# EAGLE board Wordclock-main (EAGLE 6.3)
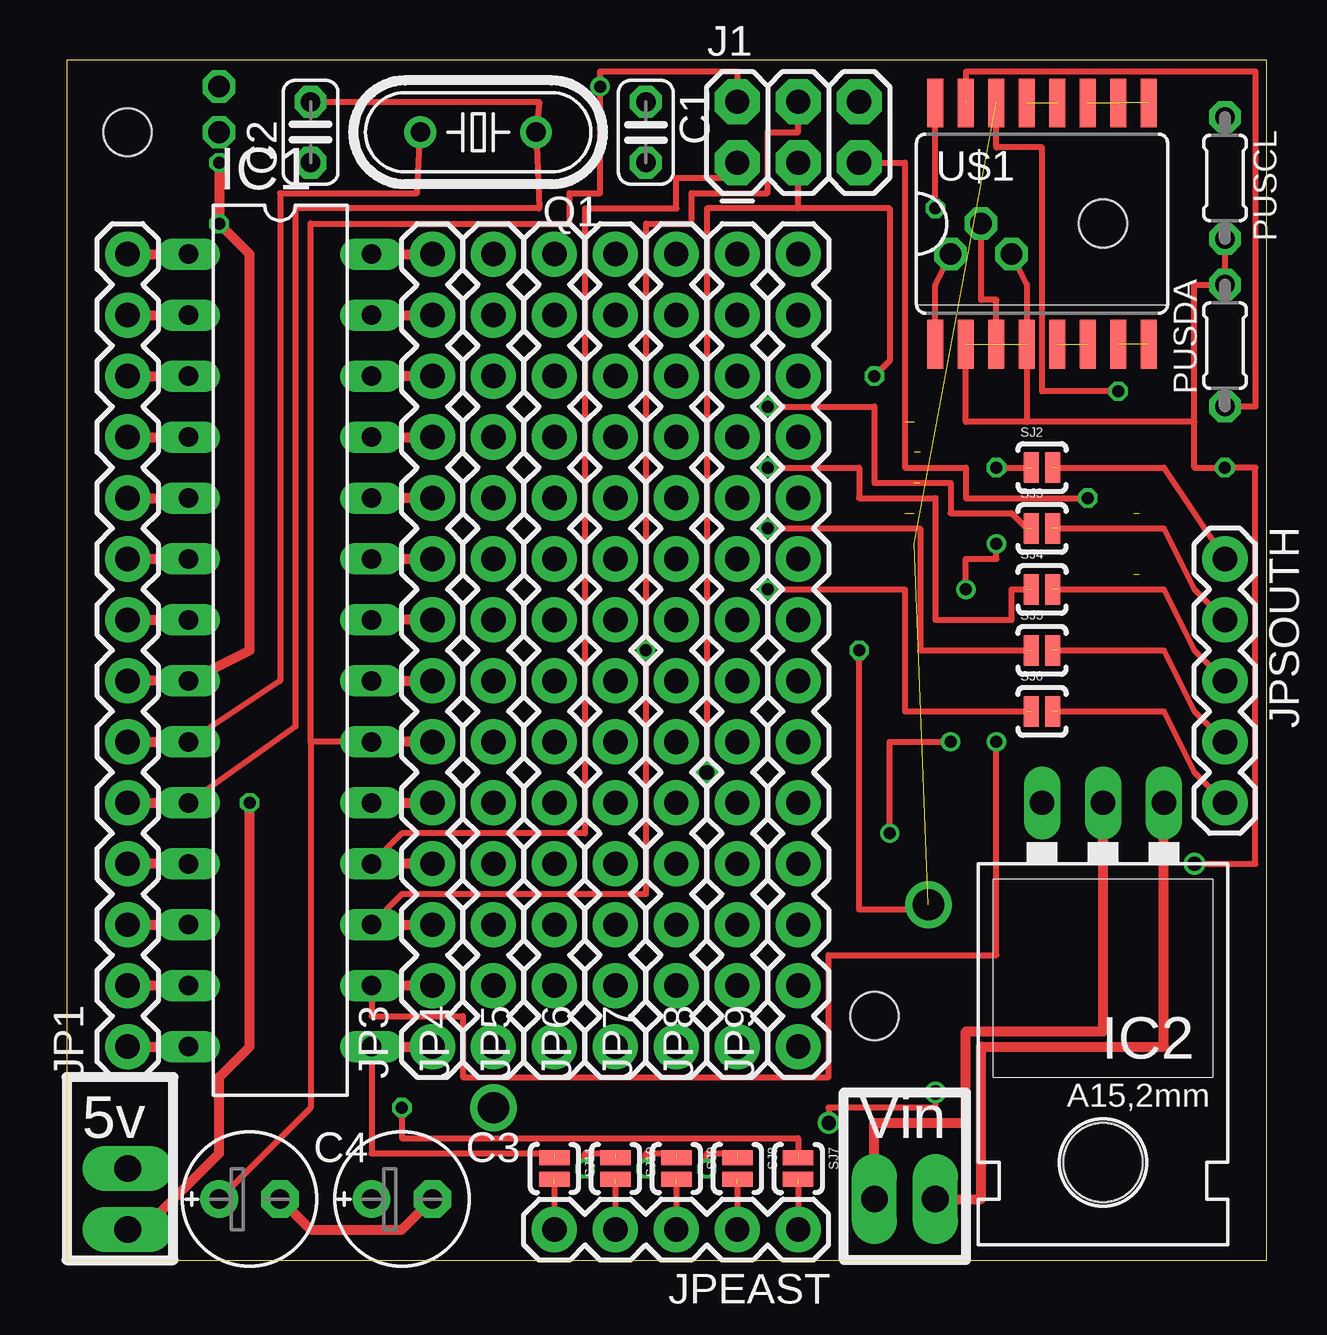
[diagram p0: board, top side]
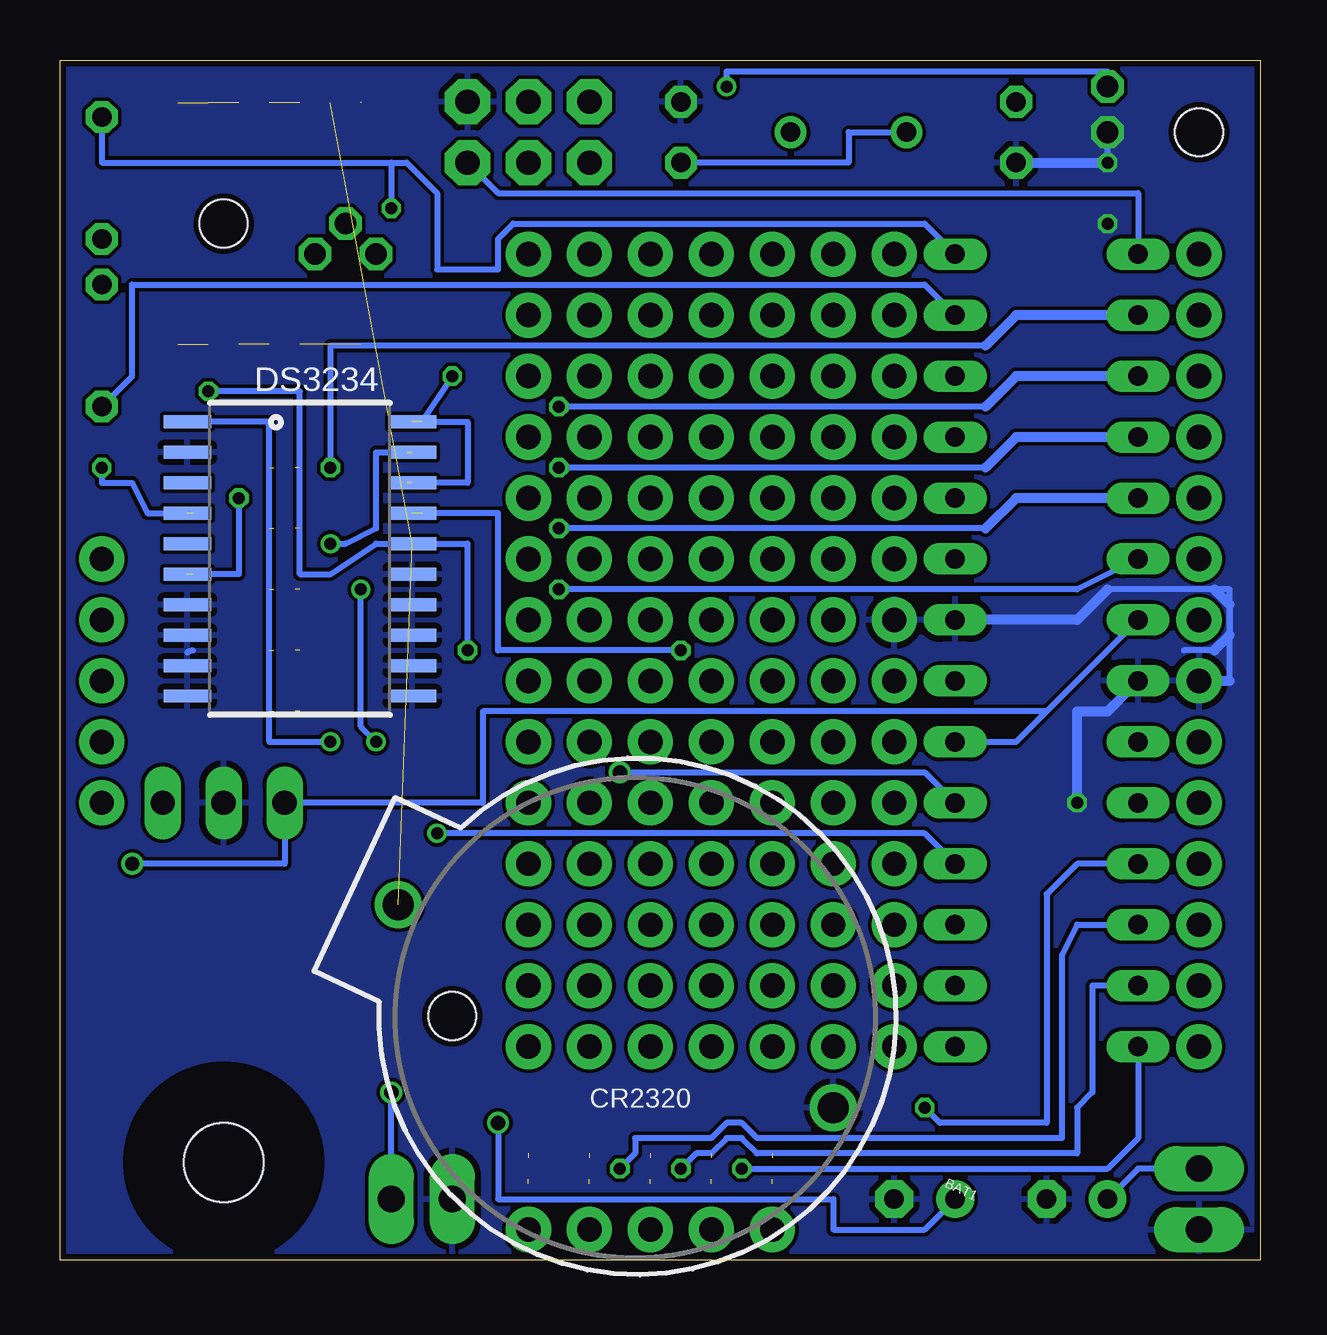
[diagram p1: board, bottom side, seen from below]

Size 50 x 50 mm. Coordinates in mm from the lower left corner, seen from the top.
Outline: 0,0 50,0 50,50 0,50 0,0
Copper layers (1*16): Top 0.035mm / dielectric 1.5mm / Bottom 0.035mm
Design rules "default": minimum track width 6mil, minimum drill 12mil, track to track 6mil, track to pad 6mil, pad to pad 6mil, via to via 6mil, smd to smd 0mil, copper to edge 10mil, drill to drill 10mil, minimum pad ring 10mil, minimum via ring 6mil, stop-mask expansion 2mil, vias tented up to drill 100mil, thermal gap 10mil
Holes 2 mm at 33.66,10.16 2.54,46.99 43.18,43.18

## Footprints (pad centres in the part's own frame; a part is rotated, then mirrored left to right if it is on the bottom)
1X02_LONGPADS = drill 1.118 pad 1.88 long: 1 0,0; 2 2.54,0
BATTCOM_20MM_PTH = drill 1.3: 1 20,0; 2 0,0
C025-024X044 = drill 0.813 octagon: 1 -1.27,0; 2 1.27,0
E2,5-6E = drill 0.813 pad 1.575: + -1.27,0 | drill 0.813 pad 1.575 octagon: - 1.27,0
DS3234 = smd 0.53 x 1.98: 1 -5.715,-4.685; 2 -4.445,-4.685; 3 -3.175,-4.685; 4 -1.905,-4.685; 5 -0.635,-4.685; 6 0.635,-4.685; 7 1.905,-4.685; 8 3.175,-4.685; 9 4.445,-4.685; 10 5.715,-4.685; 11 5.715,4.685; 12 4.445,4.685; 13 3.175,4.685; 14 1.905,4.685; 15 0.635,4.685; 16 -0.635,4.685; 17 -1.905,4.685; 18 -3.175,4.685; 19 -4.445,4.685; 20 -5.715,4.685
DIL28-3 = drill 0.813 long: 1 -16.51,-3.81; 2 -13.97,-3.81; 3 -11.43,-3.81; 4 -8.89,-3.81; 5 -6.35,-3.81; 6 -3.81,-3.81; 7 -1.27,-3.81; 8 1.27,-3.81; 9 3.81,-3.81; 10 6.35,-3.81; 11 8.89,-3.81; 12 11.43,-3.81; 13 13.97,-3.81; 14 16.51,-3.81; 15 16.51,3.81; 16 13.97,3.81; 17 11.43,3.81; 18 8.89,3.81; 19 6.35,3.81; 20 3.81,3.81; 21 1.27,3.81; 22 -1.27,3.81; 23 -3.81,3.81; 24 -6.35,3.81; 25 -8.89,3.81; 26 -11.43,3.81; 27 -13.97,3.81; 28 -16.51,3.81
78XXL = drill 1.016 long: GND 0,-3.81; IN -2.54,-3.81; OUT 2.54,-3.81 | hole 3.302: 0,11.176
2X3 = drill 1.016 pad 1.88 octagon: 1 0,0; 2 0,2.54; 3 2.54,0; 4 2.54,2.54; 5 5.08,0; 6 5.08,2.54
1X14 = drill 1.016 pad 1.88: 1 0,0; 2 2.54,0; 3 5.08,0; 4 7.62,0; 5 10.16,0; 6 12.7,0; 7 15.24,0; 8 17.78,0; 9 20.32,0; 10 22.86,0; 11 25.4,0; 12 27.94,0; 13 30.48,0; 14 33.02,0
1X05 = drill 1.016 pad 1.88: 1 0,0; 2 2.54,0; 3 5.08,0; 4 7.62,0; 5 10.16,0
0204/5 = drill 0.813 octagon: 1 -2.54,0; 2 2.54,0
HC49/S = drill 0.813: 1 -2.413,0; 2 2.413,0
SJ_2S-NO = smd 0.635 x 1.27: 1 -0.45,0; 2 0.45,0
SO16W = smd 0.66 x 2.032: 1 -5.715,-5.029; 2 -4.445,-5.029; 3 -3.175,-5.029; 4 -1.905,-5.029; 5 -0.635,-5.029; 6 0.635,-5.029; 7 1.905,-5.029; 8 3.175,-5.029; 9 3.175,5.029; 10 1.905,5.029; 11 0.635,5.029; 12 -0.635,5.029; 13 -1.905,5.029; 14 -3.175,5.029; 15 -4.445,5.029; 16 -5.715,5.029

## Placement (x,y rotation side)
5V  [1X02_LONGPADS]  2.54,1.27 90 top
BAT1  [BATTCOM_20MM_PTH]  17.78,6.35 155 bottom
C1  22pF  [C025-024X044]  24.13,46.99 270 top
C2  22pF  [C025-024X044]  10.16,46.99 90 top
C3  47u  [E2,5-6E]  13.97,2.54 0 top
C4  4.7u  [E2,5-6E]  7.62,2.54 0 top
DS3234  DS3234  [DS3234]  40.01,29.21 270 bottom
IC1  MEGA8-P  [DIL28-3]  8.89,25.4 270 top
IC2  [78XXL]  43.18,15.24 180 top
J1  AVR_SPI_PRG_6PTH  [2X3]  27.94,45.72 0 top
JP1  M14  [1X14]  2.54,8.89 90 top
JP3  M14  [1X14]  15.24,8.89 90 top
JP4  M14  [1X14]  17.78,8.89 90 top
JP5  M14  [1X14]  20.32,8.89 90 top
JP6  M14  [1X14]  22.86,8.89 90 top
JP7  M14  [1X14]  25.4,8.89 90 top
JP8  M14  [1X14]  27.94,8.89 90 top
JP9  M14  [1X14]  30.48,8.89 90 top
JPEAST  [1X05]  30.48,1.27 180 top
JPSOUTH  [1X05]  48.26,29.21 270 top
PUSCL  10k  [0204/5]  48.26,45.09 270 top
PUSDA  10k  [0204/5]  48.26,38.1 90 top
Q1  16MHz  [HC49/S]  17.14,46.99 180 top
SJ2  SOLDERJUMPERNO  [SJ_2S-NO]  40.64,33.02 0 top
SJ3  SOLDERJUMPERNO  [SJ_2S-NO]  40.64,30.48 0 top
SJ4  SOLDERJUMPERNO  [SJ_2S-NO]  40.64,27.94 0 top
SJ5  SOLDERJUMPERNO  [SJ_2S-NO]  40.64,25.4 0 top
SJ6  SOLDERJUMPERNO  [SJ_2S-NO]  40.64,22.86 0 top
SJ7  SOLDERJUMPERNO  [SJ_2S-NO]  30.48,3.81 270 top
SJ8  SOLDERJUMPERNO  [SJ_2S-NO]  27.94,3.81 270 top
SJ9  SOLDERJUMPERNO  [SJ_2S-NO]  25.4,3.81 270 top
SJ10  SOLDERJUMPERNO  [SJ_2S-NO]  22.86,3.81 270 top
SJ11  SOLDERJUMPERNO  [SJ_2S-NO]  20.32,3.81 270 top
U$1  DS3231  [SO16W]  41.91,43.18 0 top
UNREGULATED  [1X02_LONGPADS]  33.66,2.54 0 top

## Library data of the parts
5V BAT1 DS3234 IC2 J1 JP1 JP3-JP9 JPEAST JPSOUTH SJ2-SJ11 UNREGULATED = SparkFun
C1-C4 PUSCL PUSDA = resistor
IC1 = atmel; OC_FARNELL: unknown; OC_NEWARK: unknown
Q1 = crystal; OC_FARNELL: 1667008; OC_NEWARK: unknown
U$1 = kalshagar

## Nets
BATP: BAT1.1 DS3234.16 U$1.14
GND: 5V.1 BAT1.2 C1.1 C2.1 C3.- C4.- DS3234.2 DS3234.7 DS3234.8 DS3234.9 DS3234.10 DS3234.11 DS3234.12 DS3234.13 DS3234.14 DS3234.15 IC1.8 IC1.22 IC2.GND J1.6 JP1.7 JP3.8 UNREGULATED.1
N$3: JPEAST.1 SJ7.2
N$4: C1.2 IC1.9 JP1.6 Q1.2
N$5: C2.2 IC1.10 JP1.5 Q1.1
N$6: IC1.16 JP3.2
N$8: JPEAST.2 SJ8.2
N$9: JPEAST.3 SJ9.2
N$10: JPEAST.4 SJ10.2
N$11: JPEAST.5 SJ11.2
N$12: DS3234.18 DS3234.20 IC1.19 J1.3 JP3.5
N$14: DS3234.17 IC1.17 J1.4 JP3.3
N$15: JPSOUTH.1 SJ2.2
N$16: JPSOUTH.2 SJ3.2
N$17: JPSOUTH.3 SJ4.2
N$18: JPSOUTH.4 SJ5.2
N$19: JPSOUTH.5 SJ6.2
N$20: IC1.2 JP1.13 SJ2.1
N$21: IC1.3 JP1.12 SJ3.1
N$22: IC1.4 JP1.11 SJ4.1
N$23: IC1.5 JP1.10 SJ5.1
N$24: IC1.6 JP1.9 SJ6.1
N$25: IC1.15 JP3.1 SJ11.1
N$26: IC1.14 JP1.1 SJ10.1
N$27: IC1.13 JP1.2 SJ9.1
N$28: IC1.12 JP1.3 SJ8.1
N$29: IC1.11 JP1.4 SJ7.1
N$30: IC1.28 JP3.14 PUSCL.1
N$31: IC1.27 JP3.13 PUSDA.1 U$1.15
RESET: DS3234.6 IC1.1 J1.5 JP1.14
S$2: IC1.26 JP3.12
S$3: IC1.25 JP3.11
S$4: IC1.24 JP3.10
S$5: IC1.23 JP3.9
S$6: IC1.21 JP3.7
S$7: U$1.12 U$1.13
S$8: U$1.7 U$1.8
S$9: U$1.5 U$1.6
S$10: U$1.16
S$11: U$1.9 U$1.10 U$1.11
S$12: U$1.2 U$1.4
S$13: DS3234.19 IC1.18 J1.1 JP3.4
VCC: 5V.2 C4.+ DS3234.4 IC1.7 IC1.20 IC2.OUT J1.2 JP1.8 JP3.6 PUSCL.2 PUSDA.2
VIN: C3.+ IC2.IN UNREGULATED.2

## Tracks (layer width: path | path; a pad name or v marks a point on that pad's centre or on a via)
BATP  (2 unrouted)
GND  (via drill 0.5, 0.9)
  Top 0.406: 5V.1 3.17,1.27 6.35,4.45 6.35,7.62 7.62,8.89 v7.62,19.05 | C3.- 13.97,1.27 10.16,1.27 C4.- | JP1.7 IC1.8 7.62,25.4 7.62,41.91 v6.35,43.18 v6.35,45.72 | JP3.8 IC1.22 | IC2.GND 43.18,9.53 37.47,9.53 37.47,5.71 33.66,5.71 UNREGULATED.1
  Bottom 0.254: 1.27,27.3 1.27,26.04 | 1.91,25.4 3.17,25.4 | 1.27,24.13 1.27,27.94 6.35,27.94 | 44.45,25.4 44.69,25.31 | v6.35,45.72 v6.35,46.99
  Bottom 0.406: 1.91,27.94 1.27,27.3 | 1.27,26.04 1.91,25.4 | v7.62,19.05 7.62,22.86 6.35,22.86 IC1.8 | C2.1 v6.35,45.72 | JP1.7 1.27,24.13 | 6.35,27.94 7.62,26.67 IC1.22
  pour Bottom: -1.27,50.8 50.8,50.8 50.8,-1.27 -1.27,-1.27
N$3  (1 unrouted)
  Top 0.254: 30.48,3.17 JPEAST.1
N$4
  Top 0.254: IC1.9 8.89,24.13 8.89,44.45 14.61,44.45 Q1.2
  Top 0.406: JP1.6 IC1.9
  Bottom 0.254: C1.2 17.14,45.72 17.14,46.99 Q1.2
N$5
  Top 0.254: IC1.10 9.53,22.23 9.53,43.81 19.68,43.81 Q1.1 19.68,48.26 C2.2
  Top 0.406: JP1.5 IC1.10
N$6  (via drill 0.5)
  Top 0.254: IC1.16 12.7,10.16 16.51,10.16 16.51,7.62 31.75,7.62 31.75,12.7 38.73,12.7 v38.73,21.59
  Top 0.406: JP3.2 IC1.16
  Bottom 0.254: 45.09,34.92 41.27,34.92 41.27,21.59 v38.73,21.59
N$7  (via drill 0.5)
  Top 0.254: v33.02,25.4 33.02,14.61 35.56,14.61 | v43.81,36.2 40.64,36.2 40.64,46.35 38.73,46.35 38.73,48.26
  Bottom 0.254: v43.81,36.2 40.01,36.2 40.01,28.57 38.73,28.57 36.83,29.84 33.02,29.84 v33.02,25.4
N$8  (1 unrouted)
  Top 0.254: 27.94,3.17 JPEAST.2
N$9  (1 unrouted)
  Top 0.254: 25.4,3.17 JPEAST.3
N$10  (1 unrouted)
  Top 0.254: 22.86,3.17 JPEAST.4
N$11  (1 unrouted)
  Top 0.254: 20.32,3.17 JPEAST.5
N$12  (via drill 0.5, 0.61)  (2 unrouted)
  Top 0.254: v26.67,20.32 26.67,43.81 30.48,43.81 | v33.66,36.83 34.29,37.47 34.29,43.81 30.48,43.81 | 30.48,43.81 J1.3
  Top 0.406: IC1.19 JP3.5
  Bottom 0.254: IC1.19 13.97,20.32 v26.67,20.32 | v33.66,36.83 34.92,34.92 33.02,34.92 33.02,32.38 35.56,32.38
N$14  (via drill 0.5)  (1 unrouted)
  Top 0.254: IC1.17 13.97,15.24 24.13,15.24 v24.13,25.4 24.13,43.18 26.04,43.18 26.04,44.45 29.21,44.45 29.21,46.99 30.48,46.99 J1.4
  Top 0.406: IC1.17 JP3.3
  Bottom 0.254: v24.13,25.4 31.75,25.4 31.75,31.11 34.92,31.11
N$15  (1 unrouted)
  Top 0.254: 41.27,33.02 45.72,33.02 JPSOUTH.1
N$16  (1 unrouted)
  Top 0.254: 41.27,30.48 45.72,30.48 46.99,27.94 JPSOUTH.2
N$17  (1 unrouted)
  Top 0.254: 41.27,27.94 45.72,27.94 46.99,25.4 JPSOUTH.3
N$18  (1 unrouted)
  Top 0.254: 41.27,25.4 45.72,25.4 46.99,22.86 JPSOUTH.4
N$19  (1 unrouted)
  Top 0.254: 41.27,22.86 45.72,22.86 46.99,20.32 JPSOUTH.5
N$20  (via drill 0.5)  (1 unrouted)
  Top 0.254: v38.73,33.02 40.01,33.02
  Top 0.406: JP1.13 IC1.2
  Bottom 0.254: 11.43,38.1 38.73,38.1 v38.73,33.02
  Bottom 0.406: IC1.2 10.16,39.37 11.43,38.1
N$21  (via drill 0.5)  (1 unrouted)
  Top 0.254: v29.21,35.56 33.66,35.56 33.66,32.38 36.83,32.38 36.83,31.11 39.37,31.11 40.01,30.48
  Top 0.406: JP1.12 IC1.3
  Bottom 0.254: 11.43,35.56 v29.21,35.56
  Bottom 0.406: IC1.3 10.16,36.83 11.43,35.56
N$22  (via drill 0.5)  (1 unrouted)
  Top 0.254: v29.21,33.02 33.02,33.02 33.02,31.75 36.2,31.75 36.2,26.67 39.37,26.67 39.37,27.94 40.01,27.94
  Top 0.406: JP1.11 IC1.4
  Bottom 0.254: 11.43,33.02 v29.21,33.02
  Bottom 0.406: IC1.4 10.16,34.29 11.43,33.02
N$23  (via drill 0.5)  (1 unrouted)
  Top 0.254: v29.21,30.48 35.56,30.48 35.56,25.4 40.01,25.4
  Top 0.406: JP1.10 IC1.5
  Bottom 0.254: 11.43,30.48 v29.21,30.48
  Bottom 0.406: IC1.5 10.16,31.75 11.43,30.48
N$24  (via drill 0.5)  (1 unrouted)
  Top 0.254: v29.21,27.94 34.92,27.94 34.92,22.86 40.01,22.86
  Top 0.406: JP1.9 IC1.6
  Bottom 0.254: IC1.6 7.62,27.94 v29.21,27.94
N$25  (1 unrouted)
  Top 0.254: IC1.15 12.7,4.45 20.32,4.45
  Top 0.406: IC1.15 JP3.1
N$26  (via drill 0.5)  (1 unrouted)
  Top 0.254: v21.59,3.81 21.59,4.45 22.86,4.45
  Top 0.406: JP1.1 IC1.14
  Bottom 0.254: IC1.14 5.08,5.08 6.35,3.81 v21.59,3.81
N$27  (via drill 0.5)  (1 unrouted)
  Top 0.254: v24.13,3.81 24.13,4.45 25.4,4.45
  Top 0.406: IC1.13 JP1.2
  Bottom 0.254: IC1.13 6.99,11.43 6.99,6.99 7.62,6.35 7.62,4.45 20.95,4.45 21.59,5.08 22.23,5.08 22.86,4.45 23.5,4.45 v24.13,3.81
N$28  (via drill 0.5)  (1 unrouted)
  Top 0.254: v26.67,3.81 26.67,4.45 27.94,4.45
  Top 0.406: JP1.3 IC1.12
  Bottom 0.254: v26.67,3.81 26.04,4.45 26.04,5.08 22.86,5.08 22.23,5.71 21.59,5.71 20.95,5.08 8.26,5.08 8.26,12.7 7.62,13.97 IC1.12
N$29  (via drill 0.5)  (1 unrouted)
  Top 0.254: v13.97,6.35 13.97,5.08 30.48,5.08 30.48,4.45
  Top 0.406: IC1.11 JP1.4
  Bottom 0.254: IC1.11 7.62,16.51 8.89,15.24 8.89,5.71 13.34,5.71 v13.97,6.35
N$30  (via drill 0.5)
  Top 0.254: v36.2,43.81 36.2,48.26
  Top 0.406: IC1.28 JP3.14
  Bottom 0.254: IC1.28 13.97,43.18 31.11,43.18 31.75,42.55 31.75,41.27 34.29,41.27 34.29,44.45 35.56,45.72 36.2,45.72 | 36.2,45.72 48.26,45.72 PUSCL.1 | 36.2,45.72 v36.2,43.81
N$31  (1 unrouted)
  Top 0.254: PUSDA.1 49.53,35.56 49.53,49.53 37.47,49.53 37.47,48.26
  Top 0.406: IC1.27 JP3.13
  Bottom 0.254: IC1.27 13.97,40.64 46.99,40.64 46.99,36.83 PUSDA.1
RESET  (via drill 0.5)  (1 unrouted)
  Top 0.254: J1.5 34.92,45.72 34.92,33.02 37.47,33.02 37.47,31.75 v42.55,31.75
  Top 0.406: JP1.14 IC1.1
  Bottom 0.254: IC1.1 5.08,44.45 31.75,44.45 J1.5 | v42.55,31.75 42.55,28.57 44.45,28.57
S$2
  Top 0.406: JP3.12 IC1.26
S$3
  Top 0.406: IC1.25 JP3.11
S$4
  Top 0.406: JP3.10 IC1.24
S$5
  Top 0.406: IC1.23 JP3.9
S$6
  Top 0.406: IC1.21 JP3.7
S$7  (1 unrouted)
S$8  (1 unrouted)
S$9  (1 unrouted)
S$11  (2 unrouted)
S$12  (1 unrouted)
S$13  (via drill 0.5)  (1 unrouted)
  Top 0.254: IC1.18 13.97,17.78 21.59,17.78 21.59,43.81 25.4,43.81 25.4,45.09 27.94,45.09 J1.1 | v34.29,17.78 34.29,21.59 v36.83,21.59 | v37.47,27.94 37.47,29.21 38.73,29.21 v38.73,29.84
  Top 0.406: JP3.4 IC1.18
  Bottom 0.254: IC1.18 13.97,17.78 v34.29,17.78 | v36.83,21.59 37.47,22.23 v37.47,27.94 | v38.73,29.84 38.1,29.84 36.83,30.48 36.83,33.66 35.56,33.66
S$14  (via drill 0.9)
  Top 0.254: 38.73,38.73 38.73,40.01 38.1,40.01 v38.1,43.18
S$16  (via drill 0.9)
  Top 0.254: 36.2,38.1 36.2,40.64 v36.83,41.91
VCC  (via drill 0.5, 0.6, 0.9)  (1 unrouted)
  Top 0.254: 10.16,21.59 10.16,43.18 20.95,43.18 20.95,44.45 22.23,44.45 v22.23,48.9 22.23,49.53 27.94,49.53 J1.2 | IC1.20 10.16,21.59 | C4.+ 10.16,6.35 10.16,21.59 | v46.99,16.51 49.53,16.51 49.53,33.02 v48.26,33.02 46.99,33.02 46.99,34.92 | PUSCL.2 PUSDA.2 46.99,40.64 46.99,34.92 | 46.99,34.92 40.01,34.92 | 40.01,34.92 37.47,34.92 37.47,38.73 | v39.37,41.91 40.01,40.64 40.01,34.92
  Top 0.406: JP1.8 IC1.7 | JP3.6 IC1.20
  Bottom 0.254: C4.+ 5.08,3.81 5V.2 | 8.89,22.86 10.16,21.59 IC1.20 | 8.89,22.86 IC1.7 | 8.89,22.86 32.38,22.86 32.38,19.05 IC2.OUT 40.64,16.51 v46.99,16.51 | 44.45,31.11 46.35,31.11 46.99,32.38 48.26,32.38 v48.26,33.02 | v22.23,48.9 22.23,49.53 6.35,49.53 v6.35,48.9
VIN  (via drill 0.6)
  Top 0.254: v36.2,6.99 36.2,6.35 31.75,6.35 v31.75,5.71
  Top 0.406: IC2.IN 45.72,8.89 38.1,8.89 38.1,2.54 UNREGULATED.2
  Bottom 0.254: C3.+ 13.97,1.27 17.78,1.27 17.78,2.54 31.75,2.54 v31.75,5.71 | UNREGULATED.2 v36.2,6.99

## Text on the board
tPlace: 5v | Vin
bNames: CR2320
Name: + | - | DS3231 | v1.2 | 10k+ | 10k+ | v1.2 (May2013) | - | + | Main board | - | + | http://kalshagar.wikispaces.com/WordClock | LM7805 | ATmega328 | + | - | - | - | - | Order #44009 | 10uF | 100uF | +